# EAGLE board stm32-lqfp64-adapter (EAGLE 7.2.0)
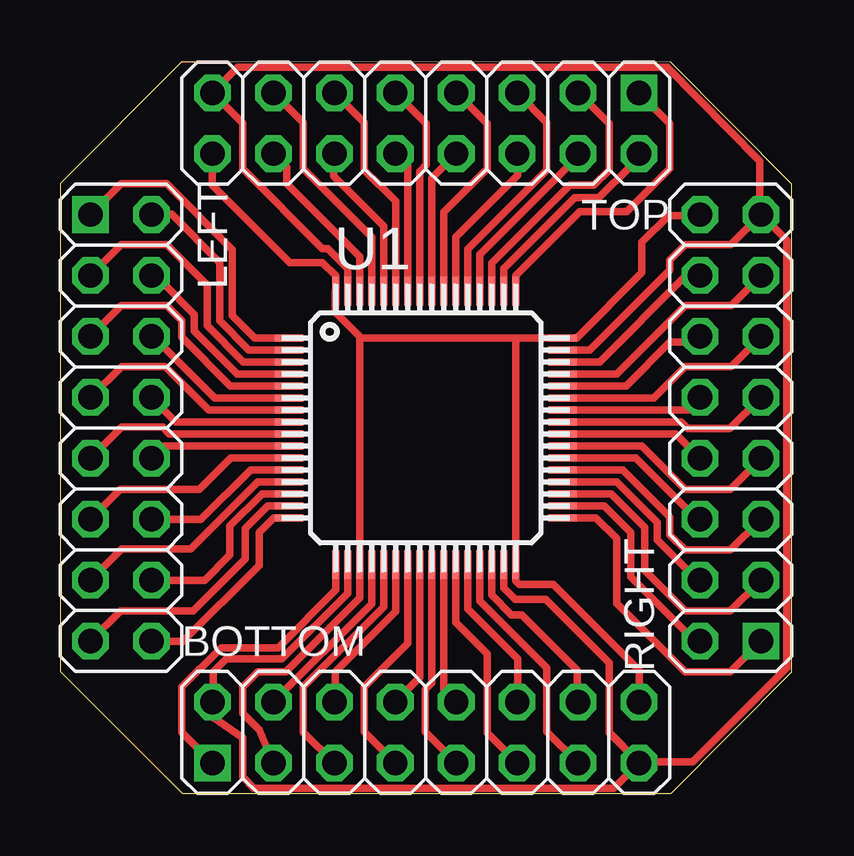
[diagram p0: board, top side]

Size 30.48 x 30.5 mm. Coordinates in mm from the lower left corner, seen from the top.
Outline: 0,5.09 5.09,0 25.47,0 30.48,5.06 30.48,25.39 25.42,30.5 5.72,30.48 5.06,30.48 0,25.42 0,5.09
Copper layers (1*16): Top 0.035mm / dielectric 1.5mm / Bottom 0.035mm
Design rules "default": minimum track width 10mil, minimum drill 24mil, track to track 8mil, track to pad 8mil, pad to pad 8mil, via to via 8mil, smd to smd 8mil, copper to edge 40mil, drill to drill 8mil, minimum pad ring 10mil, minimum via ring 8mil, stop-mask expansion 4mil, vias tented up to drill 0mil, thermal gap 10mil

## Footprints (pad centres in the part's own frame; a part is rotated, then mirrored left to right if it is on the bottom)
2X08 = drill 1.016 square: 1 -8.89,-1.27 | drill 1.016 octagon: 2 -8.89,1.27; 3 -6.35,-1.27; 4 -6.35,1.27; 5 -3.81,-1.27; 6 -3.81,1.27; 7 -1.27,-1.27; 8 -1.27,1.27; 9 1.27,-1.27; 10 1.27,1.27; 11 3.81,-1.27; 12 3.81,1.27; 13 6.35,-1.27; 14 6.35,1.27; 15 8.89,-1.27; 16 8.89,1.27
TQFP64 = smd 1.2 x 0.3: 1 -5.7,3.75; 2 -5.7,3.25; 3 -5.7,2.75; 4 -5.7,2.25; 5 -5.7,1.75; 6 -5.7,1.25; 7 -5.7,0.75; 8 -5.7,0.25; 9 -5.7,-0.25; 10 -5.7,-0.75; 11 -5.7,-1.25; 12 -5.7,-1.75; 13 -5.7,-2.25; 14 -5.7,-2.75; 15 -5.7,-3.25; 16 -5.7,-3.75; 33 5.7,-3.75; 34 5.7,-3.25; 35 5.7,-2.75; 36 5.7,-2.25; 37 5.7,-1.75; 38 5.7,-1.25; 39 5.7,-0.75; 40 5.7,-0.25; 41 5.7,0.25; 42 5.7,0.75; 43 5.7,1.25; 44 5.7,1.75; 45 5.7,2.25; 46 5.7,2.75; 47 5.7,3.25; 48 5.7,3.75 | smd 0.3 x 1.2: 17 -3.75,-5.7; 18 -3.25,-5.7; 19 -2.75,-5.7; 20 -2.25,-5.7; 21 -1.75,-5.7; 22 -1.25,-5.7; 23 -0.75,-5.7; 24 -0.25,-5.7; 25 0.25,-5.7; 26 0.75,-5.7; 27 1.25,-5.7; 28 1.75,-5.7; 29 2.25,-5.7; 30 2.75,-5.7; 31 3.25,-5.7; 32 3.75,-5.7; 49 3.75,5.7; 50 3.25,5.7; 51 2.75,5.7; 52 2.25,5.7; 53 1.75,5.7; 54 1.25,5.7; 55 0.75,5.7; 56 0.25,5.7; 57 -0.25,5.7; 58 -0.75,5.7; 59 -1.25,5.7; 60 -1.75,5.7; 61 -2.25,5.7; 62 -2.75,5.7; 63 -3.25,5.7; 64 -3.75,5.7

## Placement (x,y rotation side)
BOTTOM  [2X08]  15.24,2.54 0 top
LEFT  [2X08]  2.54,15.24 270 top
RIGHT  [2X08]  27.94,15.24 90 top
TOP  [2X08]  15.24,27.94 180 top
U1  STM32F10XRXT6  [TQFP64]  15.24,15.24 0 top

## Library data of the parts
BOTTOM LEFT RIGHT TOP = pinhead-2
U1 = stm32

## Nets
N$1: LEFT.1 U1.1
N$2: LEFT.12 U1.12
N$3: LEFT.13 U1.13
N$4: LEFT.5 U1.5
N$5: LEFT.6 U1.6
N$6: TOP.6 U1.54
N$7: LEFT.7 U1.7
N$8: TOP.12 U1.60
N$9: LEFT.2 U1.2
N$10: LEFT.3 U1.3
N$11: LEFT.4 U1.4
N$12: LEFT.8 U1.8
N$13: LEFT.9 U1.9
N$14: LEFT.10 U1.10
N$15: LEFT.11 U1.11
N$16: LEFT.14 U1.14
N$17: LEFT.15 U1.15
N$18: LEFT.16 U1.16
N$19: BOTTOM.1 U1.17
N$20: BOTTOM.8 U1.24
N$21: BOTTOM.2 BOTTOM.15 RIGHT.15 TOP.15 U1.18 U1.31 U1.47 U1.63
N$22: BOTTOM.3 BOTTOM.16 RIGHT.16 TOP.16 U1.19 U1.32 U1.48 U1.64
N$23: BOTTOM.4 U1.20
N$24: BOTTOM.5 U1.21
N$25: BOTTOM.6 U1.22
N$26: BOTTOM.7 U1.23
N$27: BOTTOM.9 U1.25
N$28: BOTTOM.10 U1.26
N$29: BOTTOM.11 U1.27
N$30: BOTTOM.12 U1.28
N$31: BOTTOM.13 U1.29
N$32: BOTTOM.14 U1.30
N$33: RIGHT.1 U1.33
N$34: RIGHT.2 U1.34
N$35: RIGHT.3 U1.35
N$36: RIGHT.4 U1.36
N$37: RIGHT.5 U1.37
N$38: RIGHT.6 U1.38
N$39: RIGHT.7 U1.39
N$40: RIGHT.8 U1.40
N$41: TOP.3 U1.51
N$42: RIGHT.9 U1.41
N$43: RIGHT.10 U1.42
N$44: RIGHT.11 U1.43
N$45: RIGHT.12 U1.44
N$46: RIGHT.13 U1.45
N$47: RIGHT.14 U1.46
N$48: TOP.1 U1.49
N$49: TOP.2 U1.50
N$50: TOP.4 U1.52
N$51: TOP.5 U1.53
N$52: TOP.13 U1.61
N$53: TOP.14 U1.62
N$54: TOP.11 U1.59
N$55: TOP.10 U1.58
N$56: TOP.9 U1.57
N$57: TOP.8 U1.56
N$58: TOP.7 U1.55

## Tracks (layer width: path | path; a pad name or v marks a point on that pad's centre or on a via)
N$1
  Top 0.305: U1.1 8.11,18.99 7.18,19.92 7.18,22.66 4.44,25.41 2.55,25.41 LEFT.1
N$2
  Top 0.305: U1.12 7.94,13.49 5.86,11.41 3.83,11.41 LEFT.12
N$3
  Top 0.305: U1.13 8.23,12.99 5.44,10.2 2.58,10.2 LEFT.13
N$4
  Top 0.305: U1.5 7.1,16.99 5.07,19.02 5.07,19.71 4.44,20.34 2.56,20.34 LEFT.5
N$5
  Top 0.305: U1.6 6.44,16.49 4.28,18.65 4.21,18.65 LEFT.6
N$6
  Top 0.305: U1.54 16.49,23.2 19.07,25.78 19.07,26.65 TOP.6
N$7
  Top 0.305: U1.7 6.2,15.99 4.38,17.8 2.56,17.8 LEFT.7
N$8
  Top 0.305: U1.60 13.49,23.65 11.41,25.73 11.41,26.65 TOP.12
N$9
  Top 0.305: U1.2 7.87,18.49 6.66,19.71 6.66,22.14 4.65,24.14 3.82,24.14 LEFT.2
N$10
  Top 0.305: U1.3 7.63,17.99 6.13,19.5 6.13,21.19 4.44,22.88 2.56,22.88 LEFT.3
N$11
  Top 0.305: U1.4 7.39,17.49 5.6,19.28 5.6,19.97 4.28,21.29 4.11,21.29 LEFT.4
N$12
  Top 0.305: U1.8 4.83,15.49 LEFT.8
N$13
  Top 0.305: U1.9 4.56,14.99 4.28,15.27 2.57,15.27 LEFT.9
N$14
  Top 0.305: U1.10 4.33,14.49 LEFT.10
N$15
  Top 0.305: U1.11 7.12,13.99 5.81,12.68 2.52,12.68 LEFT.11
N$16
  Top 0.305: U1.14 8.42,12.49 7.08,11.15 7.08,9.93 6.02,8.88 3.82,8.88 LEFT.14
N$17
  Top 0.305: U1.15 8.66,11.99 7.71,11.04 7.71,9.77 5.55,7.61 2.53,7.61 LEFT.15
N$18
  Top 0.305: U1.16 8.9,11.49 8.29,10.88 8.29,9.51 5.12,6.34 LEFT.16
N$19
  Top 0.305: U1.17 11.49,8.48 9.09,6.08 6.71,6.08 5.07,4.44 5.07,2.55 BOTTOM.1
N$20
  Top 0.305: U1.24 14.99,4.83 BOTTOM.8
N$21
  Top 0.305: U1.63 11.99,21.88 11.15,22.72 10.94,22.72 7.61,26.05 7.61,27.95 TOP.15 7.41,30.27 25.31,30.27 29.16,26.36 29.16,24.09 27.95,22.88 | 27.95,22.88 27.96,22.88 RIGHT.15 30.27,23.07 30.27,5.23 26.36,1.32 24.09,1.32 22.88,2.54 | U1.31 18.49,8.56 18.97,8.08 20.23,8.08 22.88,5.44 22.88,2.54 | 22.88,2.54 22.88,2.52 BOTTOM.15 23.07,0.21 8.08,0.21 7.61,0.69 7.61,2.33 6.39,3.17 6.39,3.85 | 6.39,3.85 6.39,5.07 6.92,5.6 9.25,5.6 11.99,8.35 U1.18 | 6.39,3.85 BOTTOM.2 | U1.47 22.08,18.49 25.41,21.82 25.41,22.24 26.05,22.88 27.95,22.88
N$22
  Top 0.305: TOP.16 6.34,25.36 9.56,22.14 10.94,22.14 11.49,21.58 U1.64 11.46,20.91 11.46,20.08 12.55,18.99 | RIGHT.16 26.63,24.09 25.36,24.09 24.25,22.98 24.25,21.71 21.53,18.99 U1.48 19.12,18.99 | BOTTOM.16 24.14,3.82 24.14,5.12 20.55,8.72 19.12,8.72 18.99,8.85 U1.32 18.99,18.86 19.12,18.99 | BOTTOM.3 8.29,2.64 7.61,3.33 7.61,4.44 8.24,5.07 9.4,5.07 12.49,8.16 U1.19 12.49,18.93 12.55,18.99 | 19.12,18.99 12.55,18.99
N$23
  Top 0.305: U1.20 12.99,7.91 BOTTOM.4
N$24
  Top 0.305: U1.21 13.49,7.78 10.14,4.44 10.14,2.56 BOTTOM.5
N$25
  Top 0.305: U1.22 13.99,7.6 11.46,5.07 11.46,3.85 BOTTOM.6
N$26
  Top 0.305: U1.23 14.49,6.25 12.68,4.44 12.68,2.56 BOTTOM.7
N$27
  Top 0.305: U1.25 15.49,4.61 15.22,4.33 15.22,2.56 BOTTOM.9
N$28
  Top 0.305: U1.26 15.99,4.33 BOTTOM.10
N$29
  Top 0.305: U1.27 16.49,7.13 17.8,5.81 17.8,2.52 BOTTOM.11
N$30
  Top 0.305: U1.28 16.99,7.68 19.07,5.6 19.07,3.83 BOTTOM.12
N$31
  Top 0.305: U1.29 17.49,8.03 20.29,5.23 20.29,2.57 BOTTOM.13
N$32
  Top 0.305: U1.30 17.99,8.27 18.81,7.45 19.23,7.45 21.55,5.12 21.55,3.85 BOTTOM.14
N$33
  Top 0.305: U1.33 22.32,11.49 23.19,10.62 23.19,7.92 26.05,5.07 27.93,5.07 RIGHT.1
N$34
  Top 0.305: U1.34 22.67,11.99 23.77,10.88 23.77,9.03 26.1,6.71 26.31,6.71 RIGHT.2
N$35
  Top 0.305: U1.35 22.96,12.49 24.36,11.1 24.36,9.3 26.05,7.61 27.93,7.61 RIGHT.3
N$36
  Top 0.305: U1.36 23.2,12.99 24.88,11.31 24.88,10.57 26.26,9.19 26.37,9.19 RIGHT.4
N$37
  Top 0.305: U1.37 23.44,13.49 25.41,11.52 25.41,10.78 26.05,10.14 27.92,10.14 RIGHT.5
N$38
  Top 0.305: U1.38 24,13.99 26.2,11.78 26.32,11.78 RIGHT.6
N$39
  Top 0.305: U1.39 24.24,14.49 26.05,12.68 27.92,12.68 RIGHT.7
N$40
  Top 0.305: U1.40 25.65,14.99 RIGHT.8
N$41
  Top 0.305: U1.51 17.99,22.11 21.24,25.36 22.24,25.36 22.88,25.99 22.88,27.92 TOP.3
N$42
  Top 0.305: U1.41 25.88,15.49 26.15,15.22 27.92,15.22 RIGHT.9
N$43
  Top 0.305: U1.42 26.15,15.99 RIGHT.10
N$44
  Top 0.305: U1.43 24.73,16.49 26.05,17.8 27.96,17.8 RIGHT.11
N$45
  Top 0.305: U1.44 23.59,16.99 25.41,18.81 26.43,18.81 RIGHT.12
N$46
  Top 0.305: U1.45 23.2,17.49 26.05,20.34 27.96,20.34 RIGHT.13
N$47
  Top 0.305: U1.46 22.48,17.99 25.99,21.5 26.58,21.5 RIGHT.14
N$48
  Top 0.305: U1.49 18.99,21.58 21.66,24.25 23.62,24.25 25.41,26.05 25.41,27.93 TOP.1
N$49
  Top 0.305: U1.50 18.49,21.87 21.45,24.83 22.45,24.83 23.77,26.15 23.77,26.31 TOP.2
N$50
  Top 0.305: U1.52 17.49,22.46 21.24,26.2 21.24,26.32 TOP.4
N$51
  Top 0.305: U1.53 16.99,22.7 20.29,25.99 20.29,27.97 TOP.5
N$52
  Top 0.305: U1.61 12.99,23.2 10.14,26.05 10.14,27.96 TOP.13
N$53
  Top 0.305: U1.62 12.49,22.38 9.46,25.41 9.46,26.1 TOP.14
N$54
  Top 0.305: U1.59 13.99,24.68 12.68,25.99 12.68,27.96 TOP.11
N$55
  Top 0.305: U1.58 14.49,26.15 TOP.10
N$56
  Top 0.305: U1.57 14.99,25.93 15.27,26.2 15.27,27.91 TOP.9
N$57
  Top 0.305: U1.56 15.49,25.65 TOP.8
N$58
  Top 0.305: U1.55 15.99,24.23 17.8,26.05 17.8,27.92 TOP.7